# Altium PCB stairlight2.PcbDoc
Units mm, origin at the board's own origin, x right, y up, seen from the top; angles counter-clockwise.
Board outline 152.4 x 101.6 mm, 2 copper layers (Top Layer, Bottom Layer); 104 components, 107 nets, 264 pads, 22 vias.
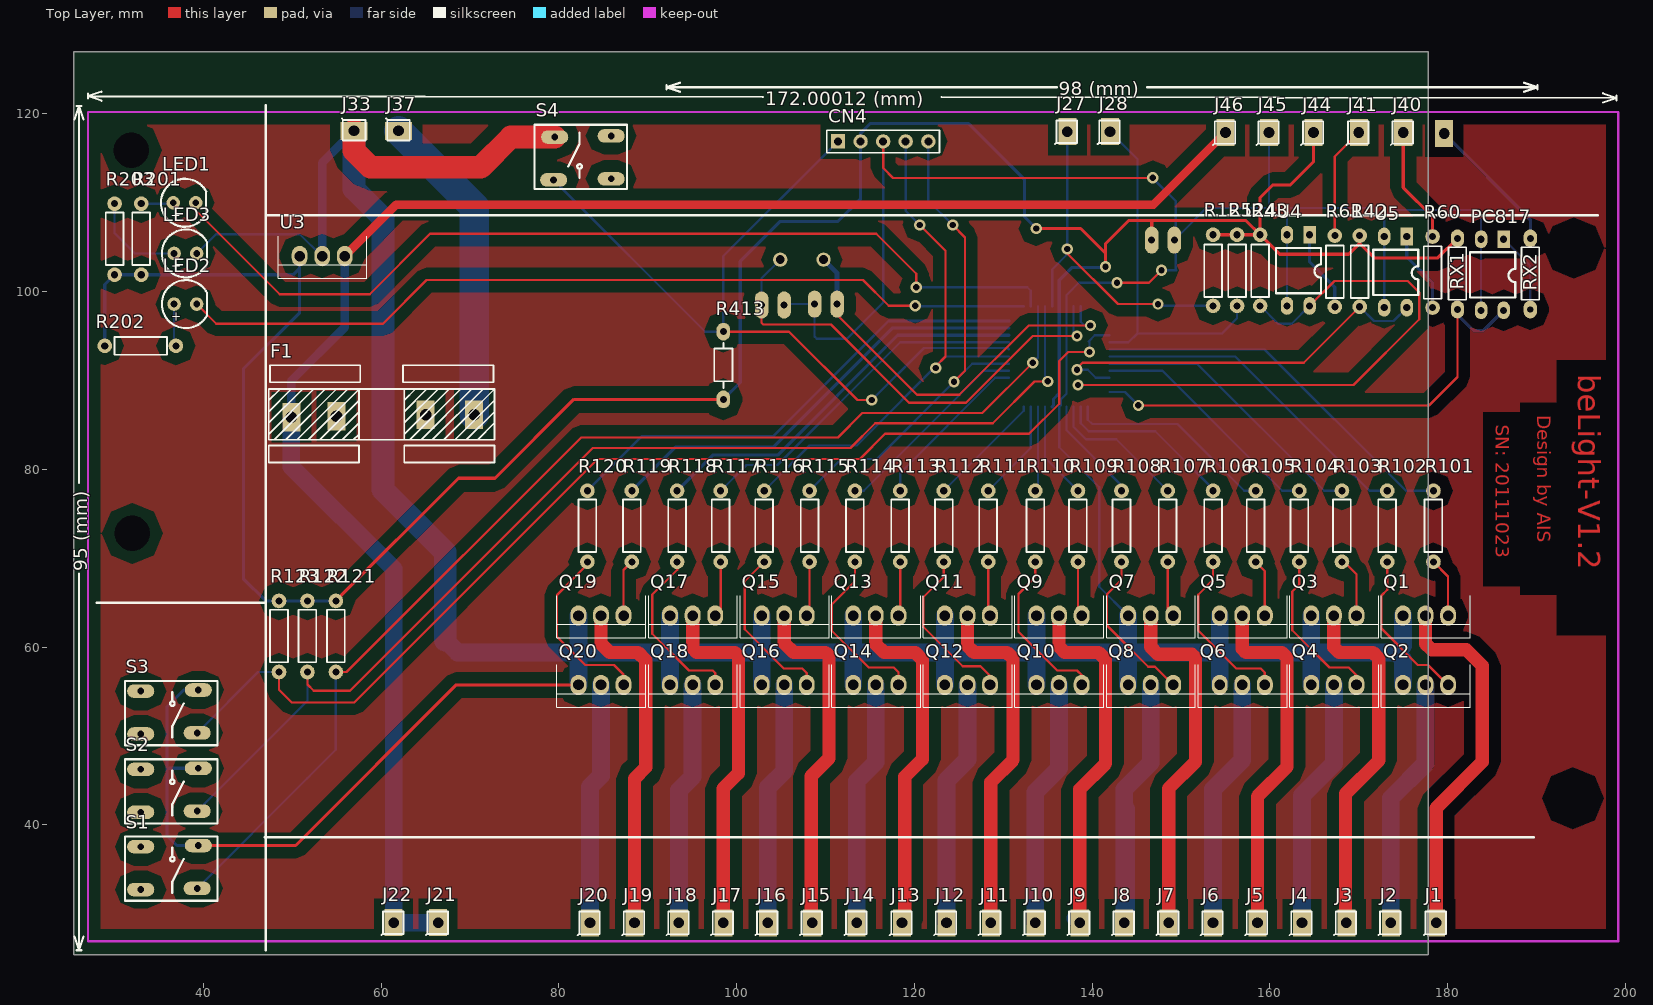
[diagram p0: Top Layer view]
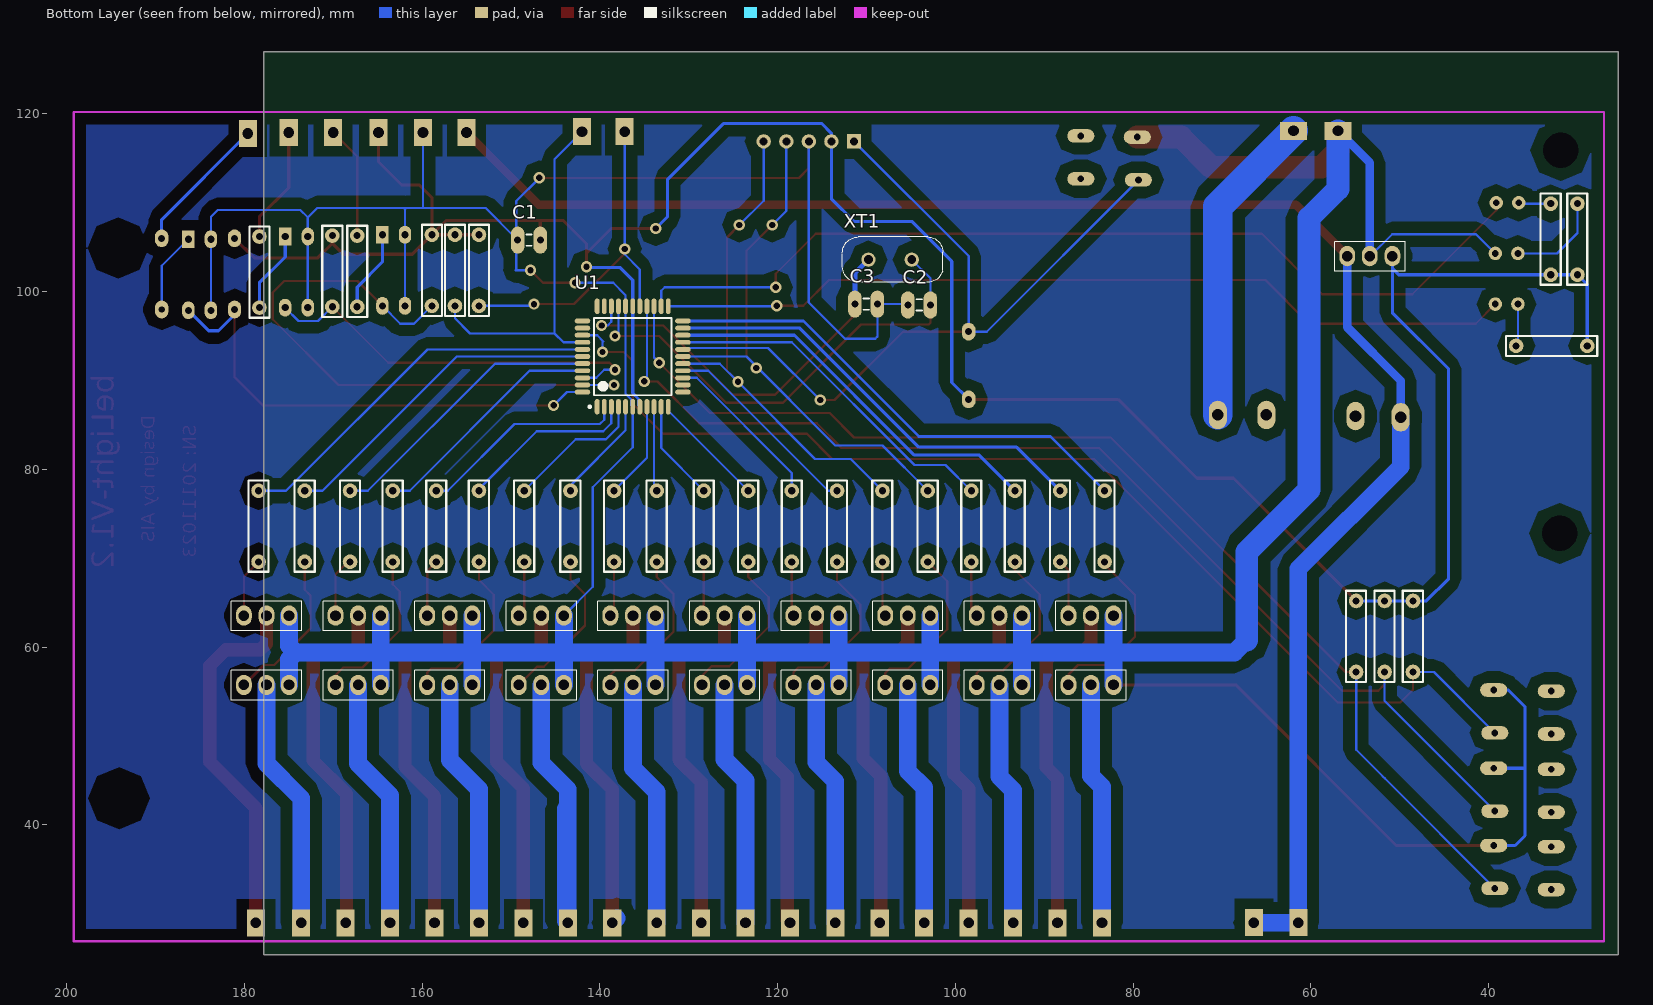
[diagram p1: Bottom Layer view, seen from below]

## Layer stack, top to bottom
Top Layer: signal copper 0.0356
Dielectric: dielectric 0.32, FR-4, Dk 4.8
Bottom Layer: signal copper 0.0356

## Board outline
25.4,25.4 177.8,25.4 177.8,127 25.4,127

## Design rules (kind name [scope] priority, off if disabled: settings)
Clearance [All] p1: gap=0.204
PolygonConnect [All] p1: connectstyle=Relief reliefconductorwidth=0.254 reliefentries=4 polygonreliefangle="90 Angle"
RoutingVias [All] p1: holewidth=0.711 width=1.27 viastyle="Through Hole" minholewidth=0.711 minwidth=1.27 maxholewidth=0.711 maxwidth=1.27
SilkscreenOverComponentPads [All] p1: minsilkscreentomaskgap=0.254
SolderMaskExpansion [All] p1: expansion=0.102
Width [All] p1: maxlimit=4.954 minlimit=0.254 preferedwidth=0.254
27 further rules are at their usual default settings.

## Components (designator, comment, footprint, x,y, rotation, side; value= is the part's Value field where it differs from the comment)
C1 "104" RAD/.100X.050 146.7,105.8 r0 bottom
C2 "22P" RAD/.100X.050 102.8,98.5 r0 bottom
C3 "22P" RAD/.100X.050 111.3,98.6 r180 bottom
CN4 "HDR1x5" CON.HDR1X5 111.4,116.9 r0 top
F1 "3A" FUSE1A 41,84.6 r0 top
J1 "DP" "SIP 1" 178.7,28.975 r0 top
J2 "DP" "SIP 1" 173.6,28.975 r0 top
J3 "DP" "SIP 1" 168.6,28.975 r0 top
J4 "DP" "SIP 1" 163.6,28.975 r0 top
J5 "DP" "SIP 1" 158.6,28.975 r0 top
J6 "DP" "SIP 1" 153.6,28.975 r0 top
J7 "DP" "SIP 1" 148.6,28.975 r0 top
J8 "DP" "SIP 1" 143.6,28.975 r0 top
J9 "DP" "SIP 1" 138.6,28.975 r0 top
J10 "DP" "SIP 1" 133.6,28.975 r0 top
J11 "DP" "SIP 1" 128.6,28.975 r0 top
J12 "DP" "SIP 1" 123.6,28.975 r0 top
J13 "DP" "SIP 1" 118.6,28.975 r0 top
J14 "DP" "SIP 1" 113.5,28.975 r0 top
J15 "DP" "SIP 1" 108.5,28.975 r0 top
J16 "DP" "SIP 1" 103.5,28.975 r0 top
J17 "DP" "SIP 1" 98.5,28.975 r0 top
J18 "DP" "SIP 1" 93.5,28.975 r0 top
J19 "DP" "SIP 1" 88.5,28.975 r0 top
J20 "DP" "SIP 1" 83.5,28.975 r0 top
J21 "DP" "SIP 1" 66.408,29 r0 top
J22 "DP" "SIP 1" 61.4,29 r0 top
J27 "DP" "SIP 1" 137.2,118 r0 top
J28 "DP" "SIP 1" 142,118 r0 top
J33 "DP" "SIP 1" 56.95,118.1 r270 top
J37 "DP" "SIP 1" 61.95,118.1 r270 top
J40 "DP" "SIP 1" 175,117.9 r0 top
J41 "DP" "SIP 1" 170,117.9 r0 top
J44 "DP" "SIP 1" 164.908,117.9 r0 top
J45 "DP" "SIP 1" 159.9,117.9 r0 top
J46 "DP" "SIP 1" 155,117.9 r0 top
LED1 "LED" "Led 5mm" 36.6,110 r0 top
LED2 "LED" "Led 5mm" 36.7,98.6 r0 top
LED3 "LED" "Led 5mm" 36.7,104.3 r0 top
PC817 "Comment" DIP4#1 186.3,105.9 r270 top
Q1 "A1015" TO-220 180.046,63.55 r90 top
Q2 "A1015" TO-220 180.046,55.75 r90 top
Q3 "A1015" TO-220 169.738,63.55 r90 top
Q4 "A1015" TO-220 169.738,55.75 r90 top
Q5 "A1015" TO-220 159.43,63.55 r90 top
Q6 "A1015" TO-220 159.43,55.75 r90 top
Q7 "A1015" TO-220 149.122,63.55 r90 top
Q8 "A1015" TO-220 149.122,55.75 r90 top
Q9 "A1015" TO-220 138.814,63.55 r90 top
Q10 "A1015" TO-220 138.814,55.75 r90 top
Q11 "A1015" TO-220 128.506,63.55 r90 top
Q12 "A1015" TO-220 128.506,55.75 r90 top
Q13 "A1015" TO-220 118.198,63.55 r90 top
Q14 "A1015" TO-220 118.198,55.75 r90 top
Q15 "A1015" TO-220 107.89,63.55 r90 top
Q16 "A1015" TO-220 107.89,55.75 r90 top
Q17 "A1015" TO-220 97.582,63.55 r90 top
Q18 "A1015" TO-220 97.582,55.75 r90 top
Q19 "A1015" TO-220 87.274,63.55 r90 top
Q20 "A1015" TO-220 87.274,55.75 r90 top
R42 "2k2" Res#1 170.1,106.3 r270 top
R43 "2k2" Res#1 158.9,106.4 r270 top
R60 "2k2" Res#1 178.3,106.2 r270 top
R61 "2k2" Res#1 167.3,106.3 r270 top
R101 "1k" Res#1 178.4,69.6 r90 top
R102 "1k" Res#1 173.2,69.6 r90 top
R103 "1k" Res#1 168.1,69.6 r90 top
R104 "1k" Res#1 163.3,69.6 r90 top
R105 "1k" Res#1 158.4,69.6 r90 top
R106 "1k" Res#1 153.6,69.6 r90 top
R107 "1k" Res#1 148.5,69.6 r90 top
R108 "1k" Res#1 143.3,69.6 r90 top
R109 "1k" Res#1 138.4,69.6 r90 top
R110 "1k" Res#1 133.6,69.6 r90 top
R111 "1k" Res#1 128.3,69.6 r90 top
R112 "1k" Res#1 123.3,69.6 r90 top
R113 "1k" Res#1 118.4,69.6 r90 top
R114 "1k" Res#1 113.3,69.6 r90 top
R115 "1k" Res#1 108.2,69.6 r90 top
R116 "1k" Res#1 103.1,69.6 r90 top
R117 "1k" Res#1 98.2,69.6 r90 top
R118 "1k" Res#1 93.3,69.6 r90 top
R119 "1k" Res#1 88.2,69.6 r90 top
R120 "1k" Res#1 83.2,69.6 r90 top
R121 "10k" Res#1 54.9,57.2 r90 top
R122 "10k" Res#1 51.7,57.2 r90 top
R123 "10k" Res#1 48.5,57.2 r90 top
R124 "10k" Res#1 156.3,106.4 r270 top
R125 "10k" Res#1 153.6,106.4 r270 top
R201 "1k" Res#1 33,101.9 r90 top
R202 "1k" Res#1 28.9,93.9 r0 top
R203 "1k" Res#1 30,101.9 r90 top
R413 "10K" R 98.5,95.5 r270 top
RX1 "Comment" Res#2 181.1,98 r90 top
RX2 "Comment" Res#3 189.3,98 r90 top
S1 "ESC" BUTTON 31.42,32.344 r0 top
S2 "ESC" BUTTON 31.42,41.044 r0 top
S3 "ESC" BUTTON 31.42,49.844 r0 top
S4 "ESC" BUTTON 87.4,117.9 r180 top
U1 "PIC16F877A-I/PT" TQFP-PT44_N 136.3,92.7 r90 bottom
U3 "LM7805" TO-220 55.9,104 r90 top
U4 "PC817" DIP4#2 164.46,106.4 r270 top
U5 "PC817" DIP4#2 175.4,106.2 r270 top
XT1 "Crystal2" Crystal.HC49/USxx 104.9,103.6 r270 bottom

## Footprints (in the part's own frame and the unit in brackets; to place one, negate y for a bottom-side part, rotate by r counter-clockwise, add the part's x,y. Pads: shape width x height; smd on the part's side, far side on the other; paste and mask are expansions set on the pad)
BUTTON [mil]
  oval 120x60 hole 30: 1(310,20) 2(315,210) 3(60,205) 4(60,15)
  silkscreen extent -10,-35 400,250, body extent -15,-40 405,255, height 1181
CON.HDR1X5 [mil]
  rect 64x64 hole 35.43: 1(0,0)
  round 64 hole 35.43: 2(100,0) 3(200,0) 4(300,0) 5(400,0)
  silkscreen extent -50,-50 450,50, body extent -50,-50 450,50, height 350
Crystal.HC49/USxx [mm] "HC49USxx package"
  rrect100% 1.6x1.6 hole 1: 1(0,0) 2(0,-4.877)
  silkscreen extent -2.55,-7.8 2.55,3.5, body extent -2.29,-7.57 2.3,3.25, height 5.08
DIP4#1 [mm]
  rect 2x1.4 hole 0.8: 1(0,0)
  oval 2x1.4 hole 0.8: 2(0,-2.54) 4(8,0)
  oval 2x1.4 hole 0.8 paste+0: 3(8,-2.54)
  silkscreen extent 1.48,-3.78 6.57,1.3, body extent -0.17,-3.72 8.19,1.34, height 5.4
DIP4#2 [mm]
  rect 2x1.4 hole 0.8: 1(0,0)
  oval 2x1.4 hole 0.8: 2(0,-2.54) 3(8,-2.54) 4(8,0)
  silkscreen extent 1.48,-3.78 6.57,1.3, body extent -0.17,-3.72 8.19,1.34, height 5.4
FUSE1A [mil]
  rect 80x126 / inner oval 80x126 / far side oval 80x126 hole 51.18: 1(350,50) 2(1160,60) 3(550,55) 4(945,60)
  silkscreen extent 250,-150 1250,280, body extent 246,-94 1254,224, height 118
"Led 5mm" [mil] "Led 5mm"
  round 60 hole 30: 1(0,0) 2(100,0)
  silkscreen extent -54,-106 146,106, body extent -54,-106 146,106, height 276
R [mil]
  oval 78.73x61 hole 31.5: 1(0,0) 2(300,0)
  silkscreen extent 50,-40 250,40, body extent -4,-39 307,39, height 79
RAD/.100X.050 [mil]
  oval 60x120 hole 31: 1(0,0) 2(100,0)
  silkscreen extent 37,-25 62,25, body extent -8,-29 110,29, height 118
Res#1 [mil] "Res 8mm*2mm"
  round 65 hole 31.5: 1(0,0) 2(314.96,0)
  silkscreen extent 43,-39 276,39, body extent -8,-44 323,43, height 141
Res#2 [mil] "Res 8mm*2mm"
  oval 78.74x59.06 hole 31.5: 1(0,0) 2(314.96,0)
  silkscreen extent 43,-39 276,39, body extent -8,-44 323,43, height 141
Res#3 [mil] "Res 8mm*2mm"
  oval 78.74x59.06 hole 27.56: 1(0,0)
  oval 78.74x59.06 hole 31.5: 2(314.96,0)
  silkscreen extent 43,-39 276,39, body extent -8,-44 323,43, height 141
"SIP 1" [mil]
  rect 80x120 hole 47.24: 1(0,0)
  silkscreen extent -55,-55 43,50, body extent -20,-43 20,39, height 197
TO-220 [mil]
  oval 90x70 hole 47.24: 1(0,0) 2(0,100) 3(0,200)
  silkscreen extent -98,-98 89,295, body extent -94,-96 83,293, height 776
TQFP-PT44_N [mm] "Thin QFP, 44-Leads, Body 10x10mm, Pitch 0.8mm, IPC Medium Density"
  oval 1.75x0.55 smd: 1(-5.65,4) 2(-5.65,3.2) 3(-5.65,2.4) 4(-5.65,1.6) 5(-5.65,0.8) 6(-5.65,0) 7(-5.65,-0.8) 8(-5.65,-1.6) 9(-5.65,-2.4) 10(-5.65,-3.2) 11(-5.65,-4) 23(5.65,-4) 24(5.65,-3.2) 25(5.65,-2.4) 26(5.65,-1.6) 27(5.65,-0.8) 28(5.65,0) 29(5.65,0.8) 30(5.65,1.6) 31(5.65,2.4) 32(5.65,3.2) 33(5.65,4)
  oval 0.55x1.75 smd: 12(-4,-5.65) 13(-3.2,-5.65) 14(-2.4,-5.65) 15(-1.6,-5.65) 16(-0.8,-5.65) 17(0,-5.65) 18(0.8,-5.65) 19(1.6,-5.65) 20(2.4,-5.65) 21(3.2,-5.65) 22(4,-5.65) 34(4,5.65) 35(3.2,5.65) 36(2.4,5.65) 37(1.6,5.65) 38(0.8,5.65) 39(0,5.65) 40(-0.8,5.65) 41(-1.6,5.65) 42(-2.4,5.65) 43(-3.2,5.65) 44(-4,5.65)
  silkscreen extent -5.77,-4.35 4.35,4.95, body extent -5,-5 5,5, height 1.2

## Part data
C1: library part Capacitor, "Cap, Ceramic Capacitor, 104, 10V"
C2 C3: library part Capacitor, "Capacitor"
CN4: "Conn, Header 1x5"
F1: library part "Fuse 2", "Fuse"
J1 J2 J3 J4 J5 J6 J7 J8 J9 J10 J11 J12 J13 J14 J15 J16 J17 J18 J19 J20 J21 J22 J27 J28 J33 J37 J40 J41 J44 J45 J46: library part Socket, "Socket"
LED1 LED2 LED3: "Led, Red, SMD0805"
Q1 Q2 Q3 Q4 Q5 Q6 Q7 Q8 Q9 Q10 Q11 Q12 Q13 Q14 Q15 Q16 Q17 Q18 Q19 Q20: "BJT, Audio Freq Amplifier PNP Transistor A1015"
R42 R43 R60 R61 R101 R102 R103 R104 R105 R106 R107 R108 R109 R110 R111 R112 R113 R114 R115 R116 R117 R118 R119 R120 R121 R122 R123 R124 R125 R201 R202 R203: library part Resistor, "Res, 1K,1/10W, 0805, 10%"
R413: library part Res1, "Resistor"
S1 S2 S3 S4: library part SW-PB, "Switch"
U1: "Enhanced FLASH Microcontroller, 8K (x14-Bit words) FLASH, 368 Bytes RAM, 44-Pin TQFP, Standard VDD Range, Industrial Temperature"
U3: library part LM78xx, "IC, Positive Voltage Linear Regulator IC, 500mA LM78xx"
U4 U5: "Opto, High Density Opto-Coupler PC817"
XT1: "Quarz Crystal"

## Free pads (board coordinates)
  round 0 hole 4: 0(31.9,115.9) 0(194.1,43) 2(194.2,104.9) 3(32,72.8)
  rect 2x3 hole 1.2: 50(179.6,117.8)

## Via types
v1: diameter 1.27, hole 0.712, Top Layer to Bottom Layer, 21 vias
v2: diameter 1.27, hole 0.711, Top Layer to Bottom Layer, 1 vias

## Nets (pads, with @x,y where several pads share a name; then routed paths per layer and width w, separated by ;. In a path a pad name is that pad's centre, name@x,y a point inside that pad or via, vN(x,y) a via of type N, cw(c..) or ccw(c..) an arc to the next point about the centre after c; other vN are vias at no path point)
+12V: F1.1 J21.1 J22.1 J46.1 U3.1 | length 192.1
  Top Layer w0.954: U3.1 61.7,109.8 146.9,109.8 J46.1
  Bottom Layer w0.954: F1.1 49.89,89.99 55.9,96 U3.1
  Bottom Layer w1.954: F1.1 49.89,80.31 61.4,68.8 J22.1 J21.1
BUT1: R121.1 S1.1 U1.25 | length 130.5
  Top Layer w0.254: R121.1 56.1,57.2 82.5,83.6 111.4,83.6 114.141,86.341 127.641,86.341 v1(133.3,92)
  Bottom Layer w0.254: S1.1 51.694,45.252 ; 51.9,45.458 51.694,45.252 ; R121.1 54.9,48.458 51.694,45.252 ; v1(133.3,92) 133.9,92.6 U1.25
BUT2: R122.1 S2.1 U1.26 | length 128.8
  Top Layer w0.254: R122.1 51.7,55.8 52.4,55.1 56.5,55.1 83.8,82.4 112.8,82.4 115.6,85.2 128.8,85.2 133.5,89.9 v1(135,89.9)
  Bottom Layer w0.254: S2.1 51.7,53.958 R122.1 ; U1.26 134.7,90.2 v1(135,89.9)
BUT3: R123.1 S3.1 U1.36 | length 128.9
  Top Layer w0.254: R123.1 48.5,55.2 49.937,53.763 56.963,53.763 84.375,81.175 113.875,81.175 116.7,84 132.9,84 136.3,87.4 136.3,92.2 137.3,93.2 v1(139.7,93.2)
  Bottom Layer w0.254: S3.1 46.142,57.2 R123.1 ; v1(139.7,93.2) 139.7,94.3 139.6,94.4 140.3,95.1 U1.36
BUT4: J28.1 R124.2 U1.37 | length 40.9
  Bottom Layer w0.254: U1.37 144.1,94.3 145.1,95.3 ; J28.1 145.1,114.9 145.1,95.3 ; R124.2 156.3,97 154.6,95.3 145.1,95.3
DV1: J1.1 Q1.2 | length 41.7
  Top Layer w1.5: Q1.2 177.506,60.394 178.2,59.7 182.1,59.7 183.9,57.9 183.9,47.1 178.7,41.9 J1.1
DV2: J2.1 Q2.2 | length 32.2
  Bottom Layer w2: 173.6,32.8 J2.1 173.6,43 177.506,46.906 Q2.2
DV3: J3.1 Q3.2 | length 40.5
  Top Layer w1.5: Q3.2 167.198,60.002 167.8,59.4 171.6,59.4 172.238,58.762 172.238,47.238 168.5,43.5 168.5,29.075 J3.1
DV4: J4.1 Q4.2 | length 29.8
  Bottom Layer w2: J4.1 163.6,33.2 ; 163.6,34.7 163.6,33.2 ; Q4.2 167.198,46.898 163.6,43.3 163.6,33.2
DV5: J5.1 Q5.2 | length 40.4
  Top Layer w1.5: Q5.2 156.89,59.81 157.3,59.4 161.348,59.4 161.93,58.818 161.93,46.53 158.6,43.2 J5.1
DV6: J6.1 Q6.2 | length 30.7
  Bottom Layer w2: J6.1 153.6,34 ; 153.6,36.6 153.6,34 ; Q6.2 156.89,47.29 153.6,44 153.6,34
DV7: J7.1 Q7.2 | length 40.2
  Top Layer w1.5: Q7.2 146.582,60.018 147.4,59.2 151.22,59.2 151.622,58.798 151.622,47.122 148.6,44.1 J7.1
DV8: J8.1 Q8.2 | length 40.9
  Bottom Layer w2: 143.805,41.825 143.805,29.18 J8.1 143.6,44 146.582,46.982 Q8.2
DV9: J9.1 Q9.2 | length 40.9
  Top Layer w1.5: Q9.2 136.274,60.026 136.9,59.4 140.72,59.4 141.5,58.62 141.5,46.9 138.6,44 J9.1
  Bottom Layer w2: J9.1@138.088,29.487 J9.1
DV10: J10.1 Q10.2 | length 32.5
  Bottom Layer w2: J10.1 133.6,33.3 ; 133.6,37.9 133.6,33.3 ; Q10.2 136.274,46.374 133.6,43.7 133.6,33.3
DV11: J11.1 Q11.2 | length 39.9
  Top Layer w1.5: Q11.2 125.966,60.134 126.7,59.4 130.42,59.4 131.1,58.72 131.1,47.3 128.6,44.8 J11.1
DV12: J12.1 Q12.2 | length 30.1
  Bottom Layer w2: J12.1 123.6,34.6 ; 123.6,36.9 123.6,34.6 ; Q12.2 125.966,47.366 123.6,45 123.6,34.6
DV13: J13.1 Q13.2 | length 39.7
  Top Layer w1.5: Q13.2 115.658,60.342 116.6,59.4 120.1,59.4 120.9,58.6 120.9,47.4 118.9,45.4 118.9,29.275 J13.1
DV14: J14.1 Q14.2 | length 30.9
  Bottom Layer w2: J14.1 113.5,32.1 ; 113.5,35.3 113.5,32.1 ; Q14.2 115.658,47.058 113.5,44.9 113.5,32.1
DV15: J15.1 Q15.2 | length 39.6
  Top Layer w1.5: Q15.2 105.35,60.45 106.4,59.4 110,59.4 110.39,59.01 110.39,47.49 108.4,45.5 108.4,29.075 J15.1
DV16: J16.1 Q16.2 | length 32.8
  Bottom Layer w2: 103.5,34.2 J16.1 103.5,44.2 105.35,46.05 Q16.2
DV17: J17.1 Q17.2 | length 39.9
  Top Layer w1.5: Q17.2 95.042,59.858 95.5,59.4 99.8,59.4 100.2,59 100.2,45.8 98.5,44.1 J17.1
DV18: J18.1 Q18.2 | length 30.7
  Bottom Layer w2: 93.5,32.3 J18.1 93.5,43.9 95.042,45.442 Q18.2
DV19: J19.1 Q19.2 | length 39.1
  Top Layer w1.5: Q19.2 84.734,60.366 85.7,59.4 88.9,59.4 89.774,58.526 89.774,46.474 88.5,45.2 J19.1
DV20: J20.1 Q20.2 | length 27.3
  Bottom Layer w2: J20.1 83.5,44.3 84.734,45.534 Q20.2
GND: C1.2 C2.2 C3.2 CN4.3 J33.1 J45.1 LED3.2 PC817.2 PC817.3 Q1.3 Q2.3 Q3.3 Q4.3 Q5.3 Q6.3 Q7.3 Q8.3 Q9.3 Q10.3 Q11.3 Q12.3 Q13.3 Q14.3 Q15.3 Q16.3 Q17.3 Q18.3 Q19.3 Q20.3 S1.2 S2.2 S3.2 S4.1 U1.6 U1.29 U3.2 U4.2 U4.3 U5.2 U5.3 | length 593.1
  Top Layer w0.254: CN4.3 116.48,113.92 117.6,112.8 v1(146.8,112.8) ; v1(142.8,101) 146.4,101 v1(147.8,102.4)
  Top Layer w0.354: S1.2 50.378,37.678 68.45,55.75 Q20.3
  Top Layer w2.554: J33.1 56.95,115.85 58.8,114 71.2,114 74.592,117.392 S4.1
  Bottom Layer w0.254: LED3.2 41.4,106.46 50.84,106.46 53.3,104 U3.2 ; C2.2 105.44,98.6 C3.2 108.76,94.94 109,94.7 112.4,94.7 116.48,98.78 CN4.3 ; v1(142.8,101) 138.5,101 137.1,99.6 U1.29 137.1,88.507 136.494,87.901 136.494,87.244 U1.6 136.3,82.5 140.8,78 140.8,66.792 Q7.3 ; v1(146.8,112.8) 149.4,110.2 C1.2@149.4,105.96 ; v1(147.8,102.4) 149.4,102.4 ; C1.2 C1.2@149.4,105.96 ; C1.2@149.4,105.8 149.4,102.5 149.5,102.4 ; 159.9,109.5 J45.1 ; U4.3 U4.2 161.92,109.28 ; U5.3 U5.2 172.86,108.34 ; PC817.3 PC817.2 183.76,108.44 183,109.2 173.7,109.2 172.86,108.36 172.86,108.34 ; C1.2@149.4,105.96 152.84,109.4 161.8,109.4 161.92,109.28 ; 161.92,109.28 162.04,109.4 171.8,109.4 172.86,108.34
  Bottom Layer w0.354: S1.2 37.016,37.678 35.9,38.794 35.9,46.4 ; S2.2 35.922,46.378 35.9,46.4 ; S3.2 37.77,55.178 35.9,53.308 35.9,46.4
  Bottom Layer w0.954: U3.2 53.36,114.51 J33.1
  Bottom Layer w2: 67.2,60.8 68.6,59.4 82.194,59.4 ; Q20.3 82.194,59.4 ; Q19.3 82.194,59.4 ; Q18.3 92.502,59.4 ; Q17.3 92.502,59.4 ; Q16.3 102.81,59.4 ; Q15.3 102.81,59.4 ; Q14.3 113.118,59.4 ; Q13.3 113.118,59.4 ; Q12.3 123.426,59.4 ; Q11.3 123.426,59.4 ; Q10.3 133.734,59.4 ; Q9.3 133.734,59.4 ; Q8.3 144.042,59.4 ; Q7.3 144.042,59.4 ; Q6.3 154.35,59.4 ; Q5.3 154.35,59.4 ; Q4.3 164.658,59.4 ; Q3.3 164.658,59.4 ; Q2.3 174.966,58.634 174.2,59.4 ; Q1.3 174.966,60.166 174.2,59.4 ; 82.194,59.4 92.502,59.4 ; 92.502,59.4 102.81,59.4 ; 102.81,59.4 113.118,59.4 ; 113.118,59.4 123.426,59.4 ; 123.426,59.4 133.734,59.4 ; 133.734,59.4 144.042,59.4 ; 144.042,59.4 154.35,59.4 ; 154.35,59.4 164.658,59.4 ; 164.658,59.4 174.2,59.4
  Bottom Layer w2.554: J33.1 56.95,111.55 60.2,108.3 60.2,77.7 67.2,70.7 67.2,60.8
IN-SOLAR: J27.1 R125.2 U1.27 | length 38.6
  Top Layer w0.254: v1@137.2,104.3 142.9,98.6 v1(147.4,98.6)
  Bottom Layer w0.254: U1.27 135.5,102.5 v1@137.2,104.2 ; v1(137.2,104.8) J27.1 ; v1(147.4,98.6) 147.5,98.5 147.6,98.4 R125.2
LIGHT1: R101.2 U1.38 | length 43
  Bottom Layer w0.254: U1.38 159.4,93.5 175.3,77.6 R101.2
LIGHT2: R102.2 U1.39 | length 37.5
  Bottom Layer w0.254: U1.39 156.1,92.7 171.2,77.6 R102.2
LIGHT3: R103.2 U1.40 | length 32.1
  Bottom Layer w0.254: U1.40 151.8,91.9 166.1,77.6 R103.2
LIGHT4: R104.2 U1.41 | length 26.9
  Bottom Layer w0.254: U1.41 147.9,91.1 161.4,77.6 R104.2
LIGHT5: R105.2 U1.2 | length 23.7
  Bottom Layer w0.254: U1.2 139.5,85.6 140,85.1 149.6,85.1 157.1,77.6 R105.2
LIGHT6: R106.2 U1.3 | length 20
  Bottom Layer w0.254: U1.3 138.7,85.2 139.6,84.3 147.1,84.3 153.6,77.8 R106.2
LIGHT7: R107.2 U1.4 | length 15.8
  Bottom Layer w0.254: U1.4 137.9,84.8 139.3,83.4 142.7,83.4 R107.2
LIGHT8: R108.2 U1.5 | length 12
  Bottom Layer w0.254: U1.5 137.1,84.4 143.3,78.2 R108.2
LIGHT9: R109.2 U1.8 | length 11
  Bottom Layer w0.254: U1.8 134.7,81.3 R109.2
LIGHT10: R110.2 U1.9 | length 9.6
  Bottom Layer w0.254: R110.2 133.9,77.9 U1.9
LIGHT11: R111.2 U1.10 | length 11.4
  Bottom Layer w0.254: R111.2 133.1,82.4 U1.10
LIGHT12: R112.2 U1.11 | length 13.2
  Bottom Layer w0.254: R112.2 132.3,86.6 U1.11
LIGHT13: R113.2 U1.14 | length 18.7
  Bottom Layer w0.254: R113.2 118.4,79.6 129.1,90.3 U1.14
LIGHT14: R114.2 U1.15 | length 22.9
  Bottom Layer w0.254: R114.2 114.3,77.6 127.8,91.1 U1.15
LIGHT15: CN4.5 R115.2 U1.16 | length 57.6
  Top Layer w0.254: v1(124.3,107.5) 125.7,106.1 125.7,91.1 v1(124.462,89.862)
  Bottom Layer w0.254: R115.2 111.775,81.175 115.775,81.175 v1(124.462,89.862) 126.5,91.9 U1.16 ; CN4.5 121.56,110.24 v1(124.3,107.5)
LIGHT16: CN4.4 R116.2 U1.17 | length 61.6
  Top Layer w0.254: v1(120.6,107.5) 123.5,104.6 123.5,92.7 122.4,91.6 v1(122.4,91.4)
  Bottom Layer w0.254: R116.2 108.2,82.7 113.5,82.7 123.5,92.7 U1.17 ; CN4.4 119.02,109.08 v1(120.6,107.5)
LIGHT17: R117.2 U1.19 | length 39.4
  Bottom Layer w0.254: R117.2 101.1,80.5 104.6,80.5 118.4,94.3 U1.19
LIGHT18: R118.2 U1.20 | length 44.6
  Bottom Layer w0.354: R118.2 97.3,81.6 104.6,81.6 118.1,95.1 U1.20
LIGHT19: R119.2 U1.21 | length 50
  Bottom Layer w0.354: R119.2 93.1,82.5 104.1,82.5 117.5,95.9 U1.21
LIGHT20: R120.2 U1.22 | length 55.4
  Bottom Layer w0.3: R120.2 89.3,83.7 104.1,83.7 117.1,96.7 U1.22
MODE1: LED2.2 U1.23 | length 97.2
  Top Layer w0.254: LED2.2 41.44,96.4 60.2,96.4 65.1,101.3 114.2,101.3 117.1,98.4 v1(120.1,98.4)
  Bottom Layer w0.254: v1(120.1,98.4) 120.15,98.35 U1.23
NetF1_2: F1.2 J37.1 | length 35.5
  Bottom Layer w3.3: J37.1 70.464,109.586 F1.2
NetLED1_1: LED1.1 R201.2 | length 3.6
  Bottom Layer w0.254: R201.2 36.5,109.9 LED1.1
NetLED2_1: LED2.1 R202.2 | length 4.8
  Bottom Layer w0.254: LED2.1 36.7,94.1 R202.2
NetLED3_1: LED3.1 R203.2 | length 11
  Bottom Layer w0.254: R203.2 30,106.6 32.3,104.3 LED3.1
NetQ1_1: Q1.1 R101.1 | length 6.7
  Top Layer w0.254: R101.1 180.046,67.954 Q1.1
NetQ1_2: 
NetQ2_1: Q2.1 R102.1 | length 17.9
  Top Layer w0.254: R102.1 173.2,66.462 172.546,65.808 172.546,62.1 176.646,58 177.796,58 Q2.1
NetQ2_2: 
NetQ3_1: Q3.1 R103.1 | length 6.9
  Top Layer w0.254: R103.1 168.343,69.6 169.738,68.205 Q3.1
NetQ3_2: 
NetQ4_1: Q4.1 R104.1 | length 18.5
  Top Layer w0.254: R104.1 163.3,67.07 162.5,66.27 162.5,61.9 166.7,57.7 168.875,57.7 169.738,56.837 Q4.1
NetQ4_2: 
NetQ5_1: Q5.1 R105.1 | length 6.5
  Top Layer w0.254: R105.1 159.43,68.57 Q5.1
NetQ5_2: 
NetQ6_1: Q6.1 R106.1 | length 19.3
  Top Layer w0.254: R106.1 153.6,67.578 151.93,65.908 151.93,61.87 156.2,57.6 158.975,57.6 159.43,57.145 Q6.1
NetQ6_2: 
NetQ7_1: Q7.1 R107.1 | length 6.3
  Top Layer w0.254: R107.1 148.5,64.172 Q7.1
NetQ7_2: 
NetQ8_1: Q8.1 R108.1 | length 18.1
  Top Layer w0.254: R108.1 143.3,67.586 141.672,65.958 141.672,62.428 146.3,57.8 147.072,57.8 Q8.1
NetQ8_2: 
NetQ9_1: Q9.1 R109.1 | length 6.2
  Top Layer w0.254: R109.1 138.4,63.964 Q9.1
NetQ9_2: 
NetQ10_1: Q10.1 R110.1 | length 18.9
  Top Layer w0.254: R110.1 133.6,67.886 131.7,65.986 131.7,61.734 136.059,57.375 138.3,57.375 138.814,56.861 Q10.1
NetQ10_2: 
NetQ11_1: Q11.1 R111.1 | length 6.1
  Top Layer w0.254: R111.1 128.3,63.756 Q11.1
NetQ11_2: 
NetQ12_1: Q12.1 R112.1 | length 19.1
  Top Layer w0.254: R112.1 123.3,67.894 121.006,65.6 121.006,62.294 125.45,57.85 127.425,57.85 128.506,56.769 Q12.1
NetQ12_2: 
NetQ13_1: Q13.1 R113.1 | length 6.1
  Top Layer w0.254: Q13.1 118.4,63.752 R113.1
NetQ13_2: 
NetQ14_1: Q14.1 R114.1 | length 19.7
  Top Layer w0.254: R114.1 113.3,67.4 110.698,64.798 110.698,61.85 114.848,57.7 117.675,57.7 118.198,57.177 Q14.1
NetQ14_2: 
NetQ15_1: Q15.1 R115.1 | length 6.2
  Top Layer w0.254: Q15.1 108.2,63.86 R115.1
NetQ15_2: 
NetQ16_1: Q16.1 R116.1 | length 18.9
  Top Layer w0.254: R116.1 100.9,67.4 100.9,62 105.3,57.6 107.375,57.6 107.89,57.085 Q16.1
NetQ16_2: 
NetQ17_1: Q17.1 R117.1 | length 6.3
  Top Layer w0.254: Q17.1 98.2,64.168 R117.1
NetQ17_2: 
NetQ18_1: Q18.1 R118.1 | length 19.5
  Top Layer w0.254: R118.1 93.3,68.718 90.5,65.918 90.5,61.5 94.625,57.375 97.3,57.375 97.582,57.093 Q18.1
NetQ18_2: 
NetQ19_1: Q19.1 R119.1 | length 6.4
  Top Layer w0.254: Q19.1 87.274,68.674 R119.1
NetQ19_2: 
NetQ20_1: Q20.1 R120.1 | length 19.1
  Top Layer w0.254: R120.1 83.2,69.3 79.774,65.874 79.774,61.176 82.95,58 86.2,58 87.274,56.926
NetQ20_2: 
NetR60_2: R60.2 U5.1 | length 9.2
  Bottom Layer w0.354: U5.1 175.4,103.9 178.3,101 R60.2
NetR61_2: R61.2 U4.1 | length 9.3
  Bottom Layer w0.354: U4.1 164.46,103.34 167.3,100.5 R61.2
OSC1: C2.1 U1.30 XT1.1 | length 53.8
  Top Layer w0.254: C2.1 102.8,96.5 103,96.3 110.6,96.3 119.4,87.5 125.8,87.5 133.3,95 v1(138.3,95)
  Bottom Layer w0.254: C2.1 102.8,101.5 XT1.1 ; U1.30 137.9,95.4 v1(138.3,95)
OSC2: C3.1 U1.31 XT1.2 | length 45.3
  Top Layer w0.254: C3.1 111.3,97.4 120.3,88.4 125.05,88.4 132.85,96.2 v1(139.8,96.2)
  Bottom Layer w0.254: U1.31 138.7,96.6 139.1,96.2 v1(139.8,96.2)
  Bottom Layer w0.554: XT1.2 111.3,102.077 C3.1
pc817in: PC817.1 RX2.1 | length 9.1
  Bottom Layer w0.254: PC817.1 189.3,102.9 RX2.1
pc8170ut: PC817.4 RX1.1 U1.44 | length 56.2
  Top Layer w0.254: v2(145.2,87.2) 177.9,87.2 181.1,90.4 RX1.1
  Bottom Layer w0.254: U1.44 143.7,88.7 v2(145.2,87.2)
  Bottom Layer w0.354: RX1.1 181.1,97.4 182.9,95.6 184,95.6 PC817.4
pc-in: 
RESET: CN4.1 R413.1 S4.2 U1.18 | length 90.8
  Top Layer w0.254: R413.1 105.9,95.5 113.6,87.8 v1(115.2,87.8)
  Bottom Layer w0.254: S4.2 96.465,95.5 R413.1 98.5,104 CN4.1 ; v1(115.2,87.8) 121.066,93.666 130.484,93.666 U1.18
SEN1: R42.2 U1.42 U5.4 | length 45.3
  Top Layer w0.254: v1@138.3,91.4 138.9,92 163.8,92 R42.2
  Bottom Layer w0.254: v1(138.3,91.2) 139.5,91.2 140.4,90.3 U1.42 ; R42.2 171.7,96.7 173.9,96.7 U5.4
SEN2: R43.2 U1.43 U4.4 | length 70.4
  Top Layer w0.254: v1(138.4,89.5) 159.2,89.5 ; 160.3,89.5 159.2,89.5 ; U4.4 167.26,101.2 175.516,101.2 176.8,99.916 176.8,96.9 169.4,89.5 159.2,89.5
  Bottom Layer w0.254: v1(138.4,89.5) U1.43 ; R43.2 160.9,96.4 162.46,96.4 U4.4
sen3: pad.50 RX2.2 | length 15.8
  Bottom Layer w0.354: pad.50 189.3,108.1 RX2.2
SS1: J40.1 R60.1 | length 13.1
  Top Layer w0.354: J40.1 175,111.7 178.3,108.4 R60.1
SS2: J41.1 R61.1 | length 12.7
  Top Layer w0.254: R61.1 167.3,115.2 J41.1
TIME: LED1.2 U1.24 | length 106.8
  Top Layer w0.254: LED1.2 39.14,109.16 48.6,99.7 58.7,99.7 65.5,106.5 115.7,106.5 120.2,102 v1(120.2,100.5)
  Bottom Layer w0.254: v1(120.2,100.5) 132.7,100.5 133.1,100.1 U1.24
VCC: C1.1 CN4.2 J44.1 R42.1 R43.1 R121.2 R122.2 R123.2 R124.1 R125.1 R201.1 R202.1 R203.1 R413.2 RX1.2 U1.7 U1.28 U3.3 | length 302.1
  Top Layer w0.354: R121.2 68.7,79 72.8,79 81.68,87.88 R413.2 ; v1(133.7,107.1) 138.7,107.1 141.5,104.3 ; v1(141.5,102.8) 141.5,104.3 ; C1.1 146.7,107.9 146.8,108 ; R125.1 R124.1 R43.1 ; 158.9,109 158.9,110.6 ; J44.1 164.908,114.608 162.3,112 160.3,112 158.9,110.6 ; 170.1,105.443 168.857,104.2 161.1,104.2 R43.1 ; R42.1 170.1,105.418 171.718,103.8 178.9,103.8 RX1.2 ; 141.5,104.3 141.5,105.4 144.1,108 146.8,108 ; 146.8,108 157.3,108 R43.1 ; R43.1 158.9,110.6
  Bottom Layer w0.354: R202.1 28.9,100.8 R203.1 R201.1 50.1,101.9 50.82,102.62 ; U3.3 50.82,102.62 ; R121.2 R122.2 R123.2 47,65.2 44.5,67.7 44.5,91.3 50.82,97.62 50.82,102.62 ; R413.2 100.4,89.78 100.4,103.4 104.9,107.9 111.4,107.9 113.94,110.44 CN4.2 113.94,117.84 115,118.9 126.1,118.9 132.4,112.6 132.4,108.4 v1(133.7,107.1) ; U1.7 135.644,87.194 135.644,87.922 136.3,88.578 U1.28 136.3,101.3 137.7,102.7 141.4,102.7 v1(141.5,102.8)
pads on no net: F1.3 F1.4 S1.3 S1.4 S2.3 S2.4 S3.3 S3.4 S4.3 S4.4 U1.1 U1.12 U1.13 U1.32 U1.33 U1.34 U1.35

## Polygon pours and split planes (outlines as drawn)
no net on Bottom Layer "Top Layer-No Net" (solid): 27,120.2 27.3,119.9 198.9,119.9 198.9,27.4 198.7,27.2 27,27.2 27,119.9
no net on Top Layer "Top Layer-No Net" (solid): 27,119.4 27.2,119.6 199.2,119.6 199.2,26.9 198.7,26.4 198.2,26.9 27,26.9 27,119.8 27.4,120.2

## Keep-outs
Keep-Out Layer:
  lines w0.254: 27,26.9 199.2,26.9 199.2,120.2 27,120.2 27,26.9

## Other copper
Top Layer:
  text "beLight-V1.2" at 194.7,90.7 h2.52 r270
  text "Design by AIS" at 190.1,86.1 h1.52 r270
  text "SN: 20111023" at 185.4,85 h1.52 r270
Bottom Layer:

## Silkscreen, mask and mechanical layers (free items; w line width, h text height)
Top Overlay:
  lines w0.254: 25.492,27.424 26,25.9 ; 25.492,119.376 26,120.9 ; 25.746,25.9 26.254,25.9 ; 25.746,120.9 26.254,120.9 ; 26,68.296 26,25.9 ; 26,78.504 26,120.9 ; 26.508,27.424 26,25.9 ; 26.508,119.376 26,120.9 ; 27,121.746 27,122.254 ; 28,65 47,65 ; 28.523,121.49 27,122 ; 28.525,122.506 27,122 ; 46.9,38.6 47,38.5 47,25.9 ; 47,108.6 196.9,108.6 ; 47,121 47,38.6 189.7,38.6 ; 92.104,122.746 92.104,123.254 ; 93.628,122.492 92.104,123 ; 93.628,123.508 92.104,123 ; 102.945,121.912 27,122 ; 123.055,121.888 199,121.8 ; 136,123 92.104,123 ; 146.208,123 190.104,123 ; 188.58,122.492 190.104,123 ; 188.58,123.508 190.104,123 ; 190.104,122.746 190.104,123.254 ; 197.475,121.294 199,121.8 ; 197.477,122.31 199,121.8 ; 199,121.546 199,122.054
  text "98 (mm)" at 136.254,122.086 h1.52
  text "172.00012 (mm)" at 103.198,120.997 h1.52 r359.93
  text "95 (mm)" at 26.914,68.55 h1.52 r90

## Text inside footprints (layer, text, board x,y; h text height)
LED1: Top Overlay "+" at 36.3,108.1 h1
LED2: Top Overlay "+" at 36.4,96.7 h1
LED3: Top Overlay "+" at 36.4,102.4 h1